# EAGLE board untitled (EAGLE 8.4.0)
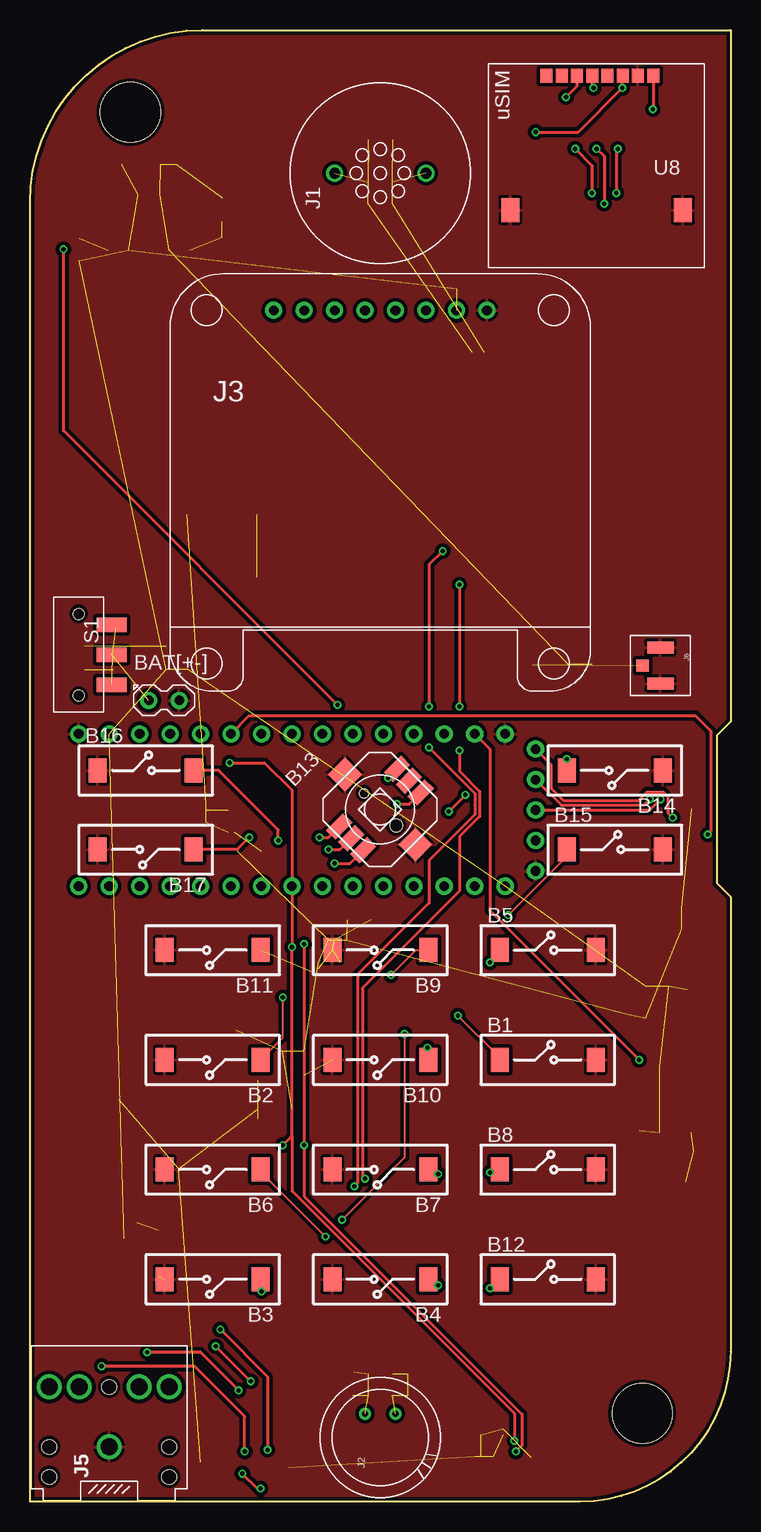
[diagram p0: board, top side]
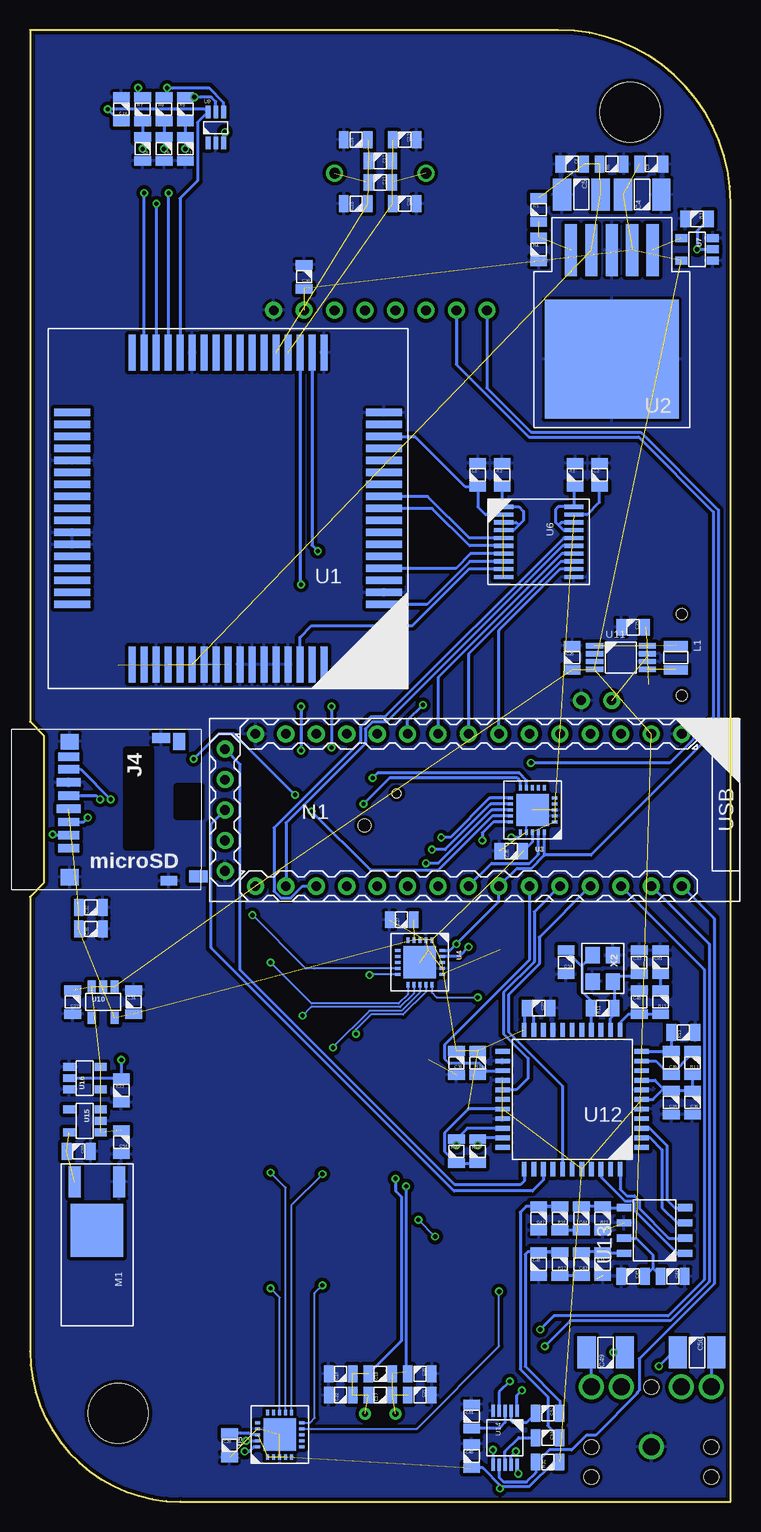
[diagram p1: board, bottom side, seen from below]

Size 58.42 x 122.68 mm. Coordinates in mm from the lower left corner, seen from the top.
Outline: 0,0 0,108.3 arc-90 14.38,122.68 58.42,122.68 58.42,65.02 57.28,63.88 57.28,51.56 58.42,50.42 58.42,12.53 arc-90 45.89,0 0,0
Copper layers (1*16): Top 0.035mm / dielectric 1.5mm / Bottom 0.035mm
Design rules "dooba": minimum track width 6mil, minimum drill 12mil, track to track 6mil, track to pad 6mil, pad to pad 6mil, via to via 6mil, smd to smd 0mil, copper to edge 10mil, drill to drill 10mil, minimum pad ring 10mil, minimum via ring 6mil, stop-mask expansion 2mil, vias tented up to drill 25mil, thermal gap 10mil
Holes 5 mm at 51.05,7.37 8.38,115.82

## Footprints (pad centres in the part's own frame; a part is rotated, then mirrored left to right if it is on the bottom)
TACTSW_MICRO3X6 = smd 1.5 x 2: 1 -4,0; 2 4,0
TACTSW-5WAY-7X7 = smd 2 x 1.1: 1 -3.4,1.4; 2 -3.4,0; 3 -3.4,-1.4; 4 3.4,1.4; 5 3.4,0; 6 3.4,-1.4 | smd 2 x 2: GND1 0,4.15; GND2 0,-4.15 | hole 0.75: 0,1.9 | hole 1.05: 0,-1.9
PIN_2 = drill 0.8 pad 1.422: 1 -1.27,0; 2 1.27,0
0805 = smd 0.8 x 1.4: 1 -1,0; 2 1,0
1210 = smd 1.524 x 2.678: 1 -1.6,0; 2 1.6,0
SPKR_AST_01532MR = drill 0.9: + 0,3.8; - 0,-3.8
MIC_CMA-4544PF-W = drill 0.5: + 2,1.27; - 2,-1.27
ADAFRUIT_OLED_13 = drill 0.8 pad 1.422: 3V3 3.81,0; CLK -6.35,0; CS 1.27,0; DATA -8.89,0; DC -3.81,0; GND 8.89,0; RST -1.27,0; VIN 6.35,0
DM3D-SF = smd 0.7 x 1.75: CLK/SCK -1.2,-1.34; CMD/DI 1,-1.34; DAT0/DO -3.4,-1.34; DAT1 -4.45,-1.34; DAT2 3.2,-1.34; DAT3/CS 2.1,-1.34 | smd 0.8 x 1.5: GND1 -6,6.36 | smd 0.8 x 1.4: GND2 5.9,7.01 | smd 1.4 x 1.5: GND3 5.6,-1.24 | smd 1.3 x 1.5: GND4 -5.7,-1.24 | smd 1 x 1.55: SW_A 5.55,9.46 | smd 1.4 x 1: SW_B -5.7,7.86 | smd 0.7 x 2.032: VDD -0.1,-1.34; VSS -2.3,-1.34
SJ1-352XN = drill 1.4 pad 2: 1 0,0; 2 5,-5; 3 5,5; 4 5,-2.5; 5 5,2.5 | hole 1.2: 5,0; 0,-5; 0,5; -2.5,5; -2.5,-5
CONUFL001 = smd 1 x 2.2: P$1 -1.5,0; P$2 1.5,0 | smd 1 x 1.05: P$3 0,-1.5
2520 = smd 0.8 x 2: 1 -1,0; 2 1,0
Z3OC_VIB_MOTOR = smd 2.6 x 1: 1 -0.5,1.85; 2 -0.5,-1.85 | smd 4.4 x 4.4: NC 3.55,0
DOOBA_IONODE = drill 0.8 pad 1.422: 1 16.51,6.35; 2 13.97,6.35; 3 11.43,6.35; 4 8.89,6.35; 5 6.35,6.35; 6 3.81,6.35; 7 1.27,6.35; 8 -1.27,6.35; 9 -3.81,6.35; 10 -6.35,6.35; 11 -8.89,6.35; 12 -11.43,6.35; 13 -13.97,6.35; 14 -16.51,6.35; 15 -19.05,6.35; 16 -19.05,-6.35; 17 -16.51,-6.35; 18 -13.97,-6.35; 19 -11.43,-6.35; 20 -8.89,-6.35; 21 -6.35,-6.35; 22 -3.81,-6.35; 23 -1.27,-6.35; 24 1.27,-6.35; 25 3.81,-6.35; 26 6.35,-6.35; 27 8.89,-6.35; 28 11.43,-6.35; 29 13.97,-6.35; 30 16.51,-6.35; 31 -21.59,5.08; 32 -21.59,2.54; 33 -21.59,0; 34 -21.59,-2.54; 35 -21.59,-5.08
JS102011 = smd 1.2 x 2.5: 1 -2.5,2.75; 2 0,2.75; 3 2.5,2.75 | hole 0.9: -3.4,0; 3.4,0
SIM5300 = smd 3 x 0.6: P$1 -13,8; P$2 -13,7; P$3 -13,6; P$4 -13,5; P$5 -13,4; P$6 -13,3; P$7 -13,2; P$8 -13,1; P$9 -13,0; P$10 -13,-1; P$11 -13,-2; P$12 -13,-3; P$13 -13,-4; P$14 -13,-5; P$15 -13,-6; P$16 -13,-7; P$17 -13,-8; P$35 13,-8; P$36 13,-7; P$37 13,-6; P$38 13,-5; P$39 13,-4; P$40 13,-3; P$41 13,-2; P$42 13,-1; P$43 13,0; P$44 13,1; P$45 13,2; P$46 13,3; P$47 13,4; P$48 13,5; P$49 13,6; P$50 13,7; P$51 13,8 | smd 0.6 x 3: P$18 -8,-13; P$19 -7,-13; P$20 -6,-13; P$21 -5,-13; P$22 -4,-13; P$23 -3,-13; P$24 -2,-13; P$25 -1,-13; P$26 0,-13; P$27 1,-13; P$28 2,-13; P$29 3,-13; P$30 4,-13; P$31 5,-13; P$32 6,-13; P$33 7,-13; P$34 8,-13; P$52 8,13; P$53 7,13; P$54 6,13; P$55 5,13; P$56 4,13; P$57 3,13; P$58 2,13; P$59 1,13; P$60 0,13; P$61 -1,13; P$62 -2,13; P$63 -3,13; P$64 -4,13; P$65 -5,13; P$66 -6,13; P$67 -7,13; P$68 -8,13
TO-263 = smd 1.02 x 4.32: P$1 -3.4,-6.8; P$2 -1.7,-6.8; P$3 0,-6.8; P$4 1.7,-6.8; P$5 3.4,-6.8 | smd 11.18 x 9.91: P$6 0,2.305
20-VQFN = smd 0.45 x 0.26: 1 -1.85,1; 2 -1.85,0.5; 3 -1.85,0; 4 -1.85,-0.5; 5 -1.85,-1; 11 1.85,-1; 12 1.85,-0.5; 13 1.85,0; 14 1.85,0.5; 15 1.85,1 | smd 0.26 x 0.45: 6 -1,-1.85; 7 -0.5,-1.85; 8 0,-1.85; 9 0.5,-1.85; 10 1,-1.85; 16 1,1.85; 17 0.5,1.85; 18 0,1.85; 19 -0.5,1.85; 20 -1,1.85 | smd 2.7 x 2.7: PAD 0,0
TSSOP-20 = smd 0.35 x 1.6: P$1 -2.925,-2.925; P$2 -2.275,-2.925; P$3 -1.625,-2.925; P$4 -0.975,-2.925; P$5 -0.325,-2.925; P$6 0.325,-2.925; P$7 0.975,-2.925; P$8 1.625,-2.925; P$9 2.275,-2.925; P$10 2.925,-2.925; P$11 2.925,2.925; P$12 2.275,2.925; P$13 1.625,2.925; P$14 0.975,2.925; P$15 0.325,2.925; P$16 -0.325,2.925; P$17 -0.975,2.925; P$18 -1.625,2.925; P$19 -2.275,2.925; P$20 -2.925,2.925
SOT23-5 = smd 0.66 x 1: 1 0.95,1.315; 2 0,1.315; 3 -0.95,1.315; 4 -0.95,-1.315; 5 0.95,-1.315
WE_USIM_HINGE = smd 1 x 1.2: C1 -4.72,0; C2 -2.18,0; C3 0.36,0; C4 2.9,0; C5 -3.45,0; C6 -0.91,0; C7 1.63,0; C8 4.17,0 | smd 1.5 x 2: GND@L -7.2,11.2; GND@R 7.2,11.2
SOT-323-6L = smd 0.4 x 1.05: P$1 -0.65,-1.3; P$2 0,-1.3; P$3 0.65,-1.3; P$4 0.65,1.3; P$5 0,1.3; P$6 -0.65,1.3
MSOP8 = smd 0.45 x 1.45: 1 -0.975,-2.2; 2 -0.325,-2.2; 3 0.325,-2.2; 4 0.975,-2.2; 5 0.975,2.2; 6 0.325,2.2; 7 -0.325,2.2; 8 -0.975,2.2
QFP44 = smd 1.2 x 0.4: 1 -5.8,4; 2 -5.8,3.2; 3 -5.8,2.4; 4 -5.8,1.6; 5 -5.8,0.8; 6 -5.8,0; 7 -5.8,-0.8; 8 -5.8,-1.6; 9 -5.8,-2.4; 10 -5.8,-3.2; 11 -5.8,-4; 23 5.8,-4; 24 5.8,-3.2; 25 5.8,-2.4; 26 5.8,-1.6; 27 5.8,-0.8; 28 5.8,0; 29 5.8,0.8; 30 5.8,1.6; 31 5.8,2.4; 32 5.8,3.2; 33 5.8,4 | smd 0.4 x 1.2: 12 -4,-5.8; 13 -3.2,-5.8; 14 -2.4,-5.8; 15 -1.6,-5.8; 16 -0.8,-5.8; 17 0,-5.8; 18 0.8,-5.8; 19 1.6,-5.8; 20 2.4,-5.8; 21 3.2,-5.8; 22 4,-5.8; 34 4,5.8; 35 3.2,5.8; 36 2.4,5.8; 37 1.6,5.8; 38 0.8,5.8; 39 0,5.8; 40 -0.8,5.8; 41 -1.6,5.8; 42 -2.4,5.8; 43 -3.2,5.8; 44 -4,5.8
SO8 = smd 0.6 x 1.2: P$1 -1.905,-2.54; P$2 -0.635,-2.54; P$3 0.635,-2.54; P$4 1.905,-2.54; P$5 1.905,2.54; P$6 0.635,2.54; P$7 -0.635,2.54; P$8 -1.905,2.54
PDSO-10 = smd 1 x 0.3: 1 -2.25,1; 2 -2.25,0.5; 3 -2.25,0; 4 -2.25,-0.5; 5 -2.25,-1; 6 2.25,-1; 7 2.25,-0.5; 8 2.25,0; 9 2.25,0.5; 10 2.25,1
XTAL_3225 = smd 1.4 x 1.2: 1 -1.1,-0.85; 2 1.1,-0.85; 3 1.1,0.85; 4 -1.1,0.85

## Placement (x,y rotation side)
B1  TACTSW_2MICRO3X6  [TACTSW_MICRO3X6]  43.18,36.83 0 top
B2  TACTSW_2MICRO3X6  [TACTSW_MICRO3X6]  15.24,36.83 180 top
B3  TACTSW_2MICRO3X6  [TACTSW_MICRO3X6]  15.24,18.54 180 top
B4  TACTSW_2MICRO3X6  [TACTSW_MICRO3X6]  29.21,18.54 180 top
B5  TACTSW_2MICRO3X6  [TACTSW_MICRO3X6]  43.18,45.97 0 top
B6  TACTSW_2MICRO3X6  [TACTSW_MICRO3X6]  15.24,27.69 180 top
B7  TACTSW_2MICRO3X6  [TACTSW_MICRO3X6]  29.21,27.69 180 top
B8  TACTSW_2MICRO3X6  [TACTSW_MICRO3X6]  43.18,27.69 0 top
B9  TACTSW_2MICRO3X6  [TACTSW_MICRO3X6]  29.21,45.97 180 top
B10  TACTSW_2MICRO3X6  [TACTSW_MICRO3X6]  29.21,36.83 180 top
B11  TACTSW_2MICRO3X6  [TACTSW_MICRO3X6]  15.24,45.97 180 top
B12  TACTSW_2MICRO3X6  [TACTSW_MICRO3X6]  43.18,18.54 0 top
B13  TACTSW_5WAYSMD-7X7  [TACTSW-5WAY-7X7]  29.19,57.7 45 top
B14  TACTSW_2MICRO3X6  [TACTSW_MICRO3X6]  48.77,60.96 180 top
B15  TACTSW_2MICRO3X6  [TACTSW_MICRO3X6]  48.77,54.36 0 top
B16  TACTSW_2MICRO3X6  [TACTSW_MICRO3X6]  9.65,60.96 0 top
B17  TACTSW_2MICRO3X6  [TACTSW_MICRO3X6]  9.65,54.36 180 top
BAT[+-]  PIN_2  [PIN_2]  11.18,66.8 0 top
C1  100nF  [0805]  21.08,85.6 270 bottom
C2  100nF  [0805]  10.92,85.6 270 bottom
C3  1uF  [0805]  6.6,111.51 0 bottom
C4  100uF  [1210]  7.37,108.97 0 bottom
C5  100uF  [1210]  12.45,108.97 180 bottom
C6  100nF  [0805]  13.21,111.51 180 bottom
C7  22pF  [0805]  45.47,112.78 90 bottom
C8  22pF  [0805]  47.24,112.78 90 bottom
C9  22pF  [0805]  49.02,112.78 90 bottom
C10  100nF  [0805]  50.8,116.08 90 bottom
C11  33pF  [0805]  29.21,109.98 180 bottom
C12  10pF  [0805]  29.21,111.76 180 bottom
C13  33pF  [0805]  27.18,113.54 180 bottom
C14  33pF  [0805]  31.24,113.54 0 bottom
C15  10pF  [0805]  31.24,108.2 0 bottom
C16  10pF  [0805]  27.18,108.2 180 bottom
C17  33pF  [0805]  29.21,8.89 0 bottom
C18  10pF  [0805]  29.21,10.67 0 bottom
C19  33pF  [0805]  32.51,10.67 0 bottom
C20  33pF  [0805]  25.91,10.67 180 bottom
C21  10pF  [0805]  25.91,8.89 180 bottom
C22  10pF  [0805]  32.51,8.89 0 bottom
C23  1uF  [0805]  54.86,41.66 90 bottom
C24  1uF  [0805]  49.78,41.66 270 bottom
C25  10uF  [0805]  8.13,72.9 180 bottom
C26  10uF  [0805]  13.21,70.36 270 bottom
C27  100nF  [0805]  27.43,48.51 0 bottom
C28  100nF  [0805]  18.29,54.23 0 bottom
C29  100nF  [0805]  41.78,4.7 270 bottom
C30  10uF  [0805]  35.56,102.11 90 bottom
C31  10uF  [0805]  53.34,47.75 0 bottom
C32  100nF  [0805]  53.34,49.53 0 bottom
C33  27pF  [0805]  7.62,44.96 270 bottom
C34  27pF  [0805]  13.72,44.96 90 bottom
C35  100nF  [0805]  4.95,33.27 90 bottom
C36  100nF  [0805]  3.17,33.27 90 bottom
C37  100nF  [0805]  16,41.15 180 bottom
C38  100nF  [0805]  22.86,36.58 90 bottom
C39  100nF  [0805]  4.95,36.58 90 bottom
C40  470pF  [0805]  7.62,41.66 270 bottom
C41  4.7nF  [0805]  5.84,44.96 270 bottom
C42  10uF  [0805]  4.83,18.8 180 bottom
C43  3.3uF  [0805]  12.45,19.81 90 bottom
C44  3.3uF  [0805]  12.45,23.62 90 bottom
C45  100nF  [0805]  8.13,18.8 180 bottom
C46  3.3nF  [0805]  16,19.81 270 bottom
C47  3.3nF  [0805]  16,23.62 90 bottom
C48  1uF  [0805]  21.59,3.81 270 bottom
C49  100uF  [1210]  10.41,12.45 0 bottom
C50  100uF  [1210]  2.79,12.45 180 bottom
C51  1uF  [0805]  21.59,7.11 270 bottom
C52  1uF  [0805]  15.24,7.37 180 bottom
C53  1uF  [0805]  15.24,5.33 180 bottom
C54  1uF  [0805]  50.8,29.97 90 bottom
C55  1uF  [0805]  54.36,29.21 180 bottom
J1  SPKRAST_01532MR  [SPKR_AST_01532MR]  29.21,110.74 90 top
J2  MICCMA-4544PF-W  [MIC_CMA-4544PF-W]  29.21,5.33 90 top
J3  ADAFRUIT_OLED_13  [ADAFRUIT_OLED_13]  29.21,99.31 0 top
J4  DM3D-SFDM  [DM3D-SF]  53.85,57.66 270 bottom
J5  SJ1-3523N  [SJ1-352XN]  6.6,4.57 90 top
J6  CONUFL001  [CONUFL001]  52.58,69.72 270 top
L1  4.7uH  [2520]  4.57,70.36 270 bottom
M1  Z3OC_VIB_MOTOR  [Z3OC_VIB_MOTOR]  52.83,26.16 270 bottom
N1  DOOBA_IONODE  [DOOBA_IONODE]  20.57,57.66 0 bottom
R1  10k  [0805]  12.95,85.6 270 bottom
R2  10k  [0805]  19.05,85.6 270 bottom
R3  10k  [0805]  2.79,106.93 180 bottom
R4  47k  [0805]  16,104.39 270 bottom
R5  100k  [0805]  16,107.7 270 bottom
R6  470R  [0805]  9.91,111.51 0 bottom
R7  51R  [0805]  49.02,116.08 270 bottom
R8  51R  [0805]  47.24,116.08 270 bottom
R9  51R  [0805]  45.47,116.08 270 bottom
R10  10k  [0805]  21.08,29.21 270 bottom
R11  1M  [0805]  10.67,41.15 0 bottom
R12  4.7R  [0805]  3.94,39.12 0 bottom
R13  4.7R  [0805]  3.17,36.58 90 bottom
R14  10k  [0805]  21.08,36.58 90 bottom
R15  1k  [0805]  5.84,41.66 90 bottom
R16  560R  [0805]  14.22,23.62 90 bottom
R17  560R  [0805]  14.22,19.81 90 bottom
R18  270k  [0805]  10.67,19.81 270 bottom
R19  270k  [0805]  10.67,23.62 90 bottom
R20  10k  [0805]  22.86,29.21 270 bottom
R22  100k  [0805]  15.24,3.3 0 bottom
R23  10k  [0805]  50.8,34.29 270 bottom
S1  SWITCH_SPDT  [JS102011]  4.06,70.61 270 top
U1  SIM5300EA  [SIM5300]  41.91,82.8 180 bottom
U2  MIC29302TO-263-5  [TO-263]  9.91,97.54 180 bottom
U3  MCP23008QFN  [20-VQFN]  16.51,57.66 180 bottom
U4  MCP23008QFN  [20-VQFN]  25.91,44.96 270 bottom
U5  MCP23008QFN  [20-VQFN]  37.59,5.59 90 bottom
U6  TXB0108  [TSSOP-20]  16,80.01 270 bottom
U7  SN74LVC1G125SOT23-5  [SOT23-5]  2.79,104.39 270 bottom
U8  USIM_CONN  [WE_USIM_HINGE]  47.24,118.87 180 top
U9  ESDA6V1-5W6  [SOT-323-6L]  42.93,114.55 0 bottom
U10  3.3V 600mA  [SOT23-5]  52.32,41.66 0 bottom
U11  MCP1642B  [MSOP8]  9.14,70.36 270 bottom
U12  STA013LQFP44  [QFP44]  13.21,33.53 180 bottom
U13  CS4334  [SO8]  6.35,22.61 90 bottom
U14  LM4811PDSO-10  [PDSO-10]  18.8,5.33 270 bottom
U15  2.7V 200mA  [SOT23-5]  53.85,31.75 270 bottom
U16  SN74LVC1G125SOT23-5  [SOT23-5]  53.85,35.31 90 bottom
X2  14.7456MHz  [XTAL_3225]  10.67,44.45 270 bottom

## Library data of the parts
B1-B17 BAT[+-] C1-C55 J1-J6 L1 M1 N1 R1-R20 R22 R23 S1 U1-U16 X2 = dooba

## Nets
2.7V: C55.2 M1.2 U15.5
3.3V: C2.2 C24.2 C27.2 C28.2 C29.1 C31.1 C32.1 C35.2 C36.2 C37.2 C38.2 C48.2 J4.VDD R10.2 R13.1 R14.2 R20.2 R22.2 U3.1 U3.4 U3.18 U4.1 U4.3 U4.4 U4.18 U5.1 U5.2 U5.4 U5.18 U6.P$19 U10.5 U12.6 U12.8 U12.21 U12.22 U12.29 U12.40 U14.10
3.8V: C5.1 C6.1 R5.1 R6.1 U1.P$55 U1.P$56 U1.P$57 U2.P$4
5.0V: C3.1 C4.1 C23.2 C26.2 C30.1 C42.2 C45.1 C54.2 J3.VIN N1.2 N1.16 U2.P$2 U7.5 U10.1 U10.3 U11.4 U13.P$7 U15.1 U16.5
!STA013_RST: N1.25 R14.1 U12.25
AMP_SHUTDOWN: N1.30 R22.1 U14.7
AMP_VOL_CLK: N1.29 U14.4
AMP_VOL_UPDN: N1.28 U14.6
AOUT_L: C46.1 C52.1 R17.2
AOUT_R: C47.2 C53.1 R16.2
GND: B1.2 B2.2 B3.2 B4.2 B5.2 B6.2 B7.2 B8.2 B9.2 B10.2 B11.2 B12.2 B13.5 B13.GND1 B13.GND2 B14.1 B15.2 B16.1 B17.2 BAT[+-].2 C1.1 C2.1 C3.2 C4.2 C5.2 C6.2 C7.1 C8.1 C9.1 C10.2 C13.1 C14.1 C15.1 C16.1 C19.1 C20.1 C21.1 C22.1 C23.1 C24.1 C25.2 C26.1 C27.1 C28.1 C29.2 C30.2 C31.2 C32.2 C33.1 C34.1 C35.1 C36.1 C37.1 C38.1 C40.1 C41.1 C42.1 C45.2 C46.2 C47.1 C48.1 C51.1 C54.1 C55.1 J3.GND J4.GND1 J4.GND2 J4.GND3 J4.GND4 J4.VSS J5.1 J6.P$1 J6.P$2 M1.1 N1.1 N1.15 N1.35 R1.1 R2.1 R3.2 R4.2 R6.2 R12.2 R18.2 R19.1 R23.2 U1.P$2 U1.P$17 U1.P$18 U1.P$29 U1.P$39 U1.P$45 U1.P$46 U1.P$54 U1.P$58 U1.P$59 U1.P$61 U1.P$62 U1.P$63 U1.P$64 U1.P$65 U2.P$3 U2.P$6 U3.2 U3.3 U3.17 U3.PAD U4.2 U4.17 U4.PAD U5.3 U5.17 U5.PAD U6.P$11 U7.1 U7.3 U8.C5 U8.GND@L U8.GND@R U9.P$2 U10.2 U11.6 U11.7 U12.5 U12.7 U12.19 U12.24 U12.26 U12.30 U13.P$6 U14.5 U15.2 U16.1 U16.3 X2.2 X2.4
GSM_PWR_EN: N1.10 R3.1 U7.2
GSM_PWR_KEY: N1.8 U6.P$13
GSM_RING: N1.9 U6.P$14
GSM_RXD: N1.18 U6.P$16
GSM_STATUS: N1.7 U6.P$12
GSM_TXD: N1.17 U6.P$15
I2C_SCL: J3.CLK N1.23 R10.1 U3.19 U4.19 U5.19 U12.32
I2C_SDA: J3.DATA N1.24 R20.1 U3.20 U4.20 U5.20 U12.31
MICROSD_CS: J4.DAT3/CS N1.6
N$1: B13.4 U3.9
N$2: B13.1 U3.11
N$3: B13.2 U3.12
N$4: B13.3 U3.13
N$5: B13.6 U3.10
N$6: B14.2 U3.14
N$7: B16.2 U3.15
N$8: B17.1 U3.16
N$9: B15.1 U4.9
N$10: B9.1 U4.10
N$11: B5.1 U4.11
N$12: B1.1 U4.12
N$13: B10.1 U4.13
N$14: B6.1 U4.14
N$15: B2.1 U4.15
N$16: B11.1 U4.16
N$17: B3.1 U5.9
N$18: B4.1 U5.10
N$19: B7.1 U5.11
N$20: B8.1 U5.12
N$21: B12.1 U5.13
N$22: C1.2 U1.P$15 U6.P$2 U6.P$10
N$23: U1.P$66 U6.P$9
N$24: U1.P$1 U6.P$8
N$25: U1.P$4 U6.P$7
N$26: U1.P$9 U6.P$6
N$27: U1.P$10 U6.P$5
N$28: U2.P$1 U7.4
N$29: R4.1 R5.2 U2.P$5
N$30: R1.2 U6.P$17 U6.P$18 U6.P$20
N$31: C10.1 U1.P$30 U8.C1 U9.P$6
N$32: R2.2 U6.P$1 U6.P$3 U6.P$4
N$33: R9.1 U8.C7 U9.P$5
N$34: R8.1 U8.C3 U9.P$4
N$35: C34.2 R11.1 U12.15 X2.1
N$36: R7.1 U8.C2 U9.P$3
N$37: C9.2 R7.2 U1.P$33
N$38: C8.2 R8.2 U1.P$32
N$39: C7.2 R9.2 U1.P$31
N$40: C33.2 R11.2 U12.13 X2.3
N$41: L1.2 U11.5
N$42: C39.1 R13.2 U12.10
N$43: C11.2 C12.2 C14.2 C15.2 J1.- U1.P$22
N$44: C11.1 C12.1 C13.2 C16.2 J1.+ U1.P$21
N$45: C39.2 R12.1 U12.11
N$46: C41.2 R15.2
N$47: C17.2 C18.2 C20.2 C21.2 J2.+ U1.P$19
N$48: C17.1 C18.1 C19.2 C22.2 J2.- U1.P$20
N$49: C40.2 R15.1 U12.12
N$50: C43.2 R18.1 U13.P$8
N$51: C44.2 R19.2 U13.P$5
N$52: C44.1 R16.1
N$53: C43.1 R17.1
N$54: C49.2 U14.1
N$55: C50.2 U14.9
N$56: C51.2 U14.3
N$57: C50.1 J5.3
N$58: C52.2 U14.2
N$59: C53.2 U14.8
N$60: C49.1 J5.2
N$61: J6.P$3 U1.P$60
N$62: U15.3 U16.4
SPI_MISO: J4.DAT0/DO N1.32
SPI_MOSI: J4.CMD/DI N1.31 U12.34
SPI_SCK: J4.CLK/SCK N1.33 U12.36
STA013_BIT_EN: N1.27 U12.38
STA013_DREQ: N1.26 U12.27
STA013_LRCKT: U12.2 U13.P$3
STA013_OCLK: U12.3 U13.P$4
STA013_SCKT: U12.44 U13.P$2
STA013_SDO: U12.42 U13.P$1
VBAT: BAT[+-].1 S1.2
VIBRATOR_EN: N1.14 R23.1 U16.2
VIN: C25.1 L1.1 S1.3 U11.1 U11.8

## Tracks (layer width: path | path; a pad name or v marks a point on that pad's centre or on a via)
2.7V  (2 unrouted)
3.3V  (via drill 0.36)  (24 unrouted)
  Top 0.254: v17.71,2.34 18.9,1.14 19.05,1.14 19.09,1.1 v19.23,1.1
  Bottom 0.254: C48.2 20.66,2.81 19.09,1.25 | 19.09,1.25 16.8,1.25 14.74,3.3 R22.2 | U14.10 17.8,2.43 v17.71,2.34 | v19.23,1.1 19.09,1.25 | U12.21 16.41,40.41 17.07,41.08 C37.2 17.21,40.94 U12.22 | R13.1 C36.2 C35.2 4.97,34.29 5.59,34.42 | U12.8 6.3,35.13 5.59,34.42 | U12.6 6.48,33.53 5.59,34.42 | R10.2 R20.2 23.84,29.19 23.84,30.73 21.84,32.73 U12.29 | U6.P$19 11.95,82.28 10.92,83.31 C2.2 | U5.18 40.03,5.59 40.13,5.69 C29.1 | U3.18 16.51,55.01 C28.2
3.8V  (7 unrouted)
5.0V  (16 unrouted)
  Bottom 0.254: U13.P$7 7.87,21.97 6.48,20.57 6.48,19.45 | 6.48,19.45 C42.2 | 6.48,19.45 C45.1
!STA013_RST
  Bottom 0.254: R14.1 20.84,35.81 20.45,35.81 20.33,35.93 | 20.33,35.93 U12.25 | N1.25 16.76,45.17 23.84,38.09 23.84,36.92 23.5,36.58 20.98,36.58 20.33,35.93
AMP_SHUTDOWN
  Bottom 0.254: U14.7 19.3,2.02 18.92,1.65 17.02,1.65 16.24,2.43 R22.1 16.13,3.3 15.11,4.32 13.24,4.32 12.01,5.55 11.24,5.55 7.78,9.02 7.78,9.12 7.62,9.27 7.62,11.93 1.37,18.18 1.37,48.62 N1.30
AMP_VOL_CLK  (via drill 0.36)
  Top 0.254: v15.49,12.95 v18.41,10.03
  Bottom 0.254: N1.29 1.78,46.48 1.78,18.35 5.04,15.09 13.36,15.09 v15.49,12.95 | v18.41,10.03 19.3,9.15 U14.4
AMP_VOL_UPDN  (via drill 0.36)
  Top 0.254: v15.88,14.35 19.81,10.41 v19.81,4.32
  Bottom 0.254: N1.28 2.2,44.36 2.2,18.5 5.21,15.49 14.73,15.49 v15.88,14.35 | v19.81,4.32 19.81,3.1 U14.6
AOUT_L
  Bottom 0.254: C46.1 R17.2 16.91,20.81 17.12,20.6 17.12,11.28 14.22,8.38 14.22,7.38 C52.1
AOUT_R
  Bottom 0.254: C47.2 R16.2 17.03,24.62 17.53,24.13 17.53,11.05 15.24,8.76 15.24,6.33 C53.1
GND  (13 unrouted)
  Bottom 0.152: U3.17 17.01,56.63 17.02,56.64 17.02,57.15 U3.PAD
  pour Top (isolate 0.305): 0,122.68 58.42,122.68 58.42,0 0,0
  pour Bottom (isolate 0.305): 0,122.68 58.42,122.68 58.42,0 0,0
GSM_PWR_EN  (via drill 0.36)
  Top 0.254: v25.65,66.42 2.79,89.28 v2.79,104.39
  Bottom 0.254: N1.10 26.92,65.15 v25.65,66.42 | U7.2 v2.79,104.39 2.79,105.93 R3.1
GSM_PWR_KEY
  Bottom 0.254: U6.P$13 14.14,78.39 21.84,70.68 N1.8
GSM_RING
  Bottom 0.254: U6.P$14 14.06,79.03 24.38,68.71 N1.9
GSM_RXD
  Bottom 0.254: U6.P$16 13.91,80.33 28.84,65.41 30.04,65.41 30.86,64.59 30.86,63.39 38.08,56.17 38.08,50.9 37.49,50.32 36.67,50.32 35.68,51.31 N1.18
GSM_STATUS
  Bottom 0.254: U6.P$12 14.21,77.73 19.3,72.64 N1.7
GSM_TXD
  Bottom 0.254: U6.P$15 13.99,79.69 28.67,65 29.87,65 30.45,64.42 30.45,63.22 37.08,56.59 N1.17
I2C_SCL  (via drill 0.36)
  Top 0.254: v21.08,29.72 21.84,30.48 | 21.84,30.48 v21.84,46.23 N1.23 21.84,59.31 19.56,61.59 v16.64,61.59 | 21.84,30.48 21.84,25.91 40.39,7.37 v40.39,5.08
  Bottom 0.254: U12.32 20.96,30.33 R10.1 v21.08,29.72 | v21.84,46.23 22.61,45.46 U4.19 | N1.23 19.94,53.21 16.76,53.21 16.01,53.97 U3.19 | v40.39,5.08 40.38,5.09 U5.19 | J3.CLK 22.86,94.8 16.8,88.75 7.66,88.75 1.42,82.51 1.42,65.41 3.07,63.75 3.07,63.6 5.08,61.59 v16.64,61.59
I2C_SDA  (via drill 0.36)
  Top 0.254: v22.86,46.48 v22.86,29.72 22.86,25.47 41.02,7.31 41.02,4.7 v40.51,4.19
  Bottom 0.254: U12.31 21.94,31.13 R20.1 v22.86,29.72 | U4.20 23.38,45.96 v22.86,46.48 19.3,50.04 N1.24 17.8,52.81 16.6,52.81 15.51,53.89 | 15.51,53.89 U3.20 | U5.20 39.73,4.59 40.13,4.19 v40.51,4.19 | J3.DATA 20.32,92.84 16.64,89.15 7.49,89.15 1.02,82.68 1.02,64.52 11.64,53.89 15.51,53.89
MICROSD_CS  (via drill 0.36)
  Top 0.254: N1.6 18.29,65.53 55.5,65.53 56.77,64.26 56.77,55.88 v56.52,55.63
  Bottom 0.254: v56.52,55.63 56.45,55.56 J4.DAT3/CS
N$1  (via drill 0.36)
  Top 0.254: v29.84,60.33 v29.84,60.34 B13.4
  Bottom 0.254: U3.9 17.01,60.13 17.61,60.73 29.44,60.73 v29.84,60.33
N$2  (via drill 0.36)
  Top 0.254: v24.13,55.37 24.88,55.37 B13.1
  Bottom 0.254: U3.11 20.09,58.66 23.37,55.37 v24.13,55.37
N$3  (via drill 0.36)
  Top 0.254: v24.89,54.36 25.85,54.36 B13.2
  Bottom 0.254: U3.12 20.01,58.16 23.82,54.36 v24.89,54.36
N$4  (via drill 0.36)
  Top 0.254: v25.4,53.21 26.68,53.21 B13.3
  Bottom 0.254: U3.13 19.94,57.66 24.38,53.21 v25.4,53.21
N$5  (via drill 0.36)
  Top 0.254: B13.6 31.64,58.17 v30.61,58.17
  Bottom 0.254: U3.10 17.51,60.05 17.78,60.33 28.45,60.33 v30.61,58.17
N$6  (via drill 0.36)
  Top 0.254: v44.77,61.91 B14.2 | v34.92,57.53 v36.32,58.93
  Bottom 0.254: U3.14 19.86,57.16 24.42,52.6 30,52.6 v34.92,57.53 | v36.32,58.93 41.4,64.01 42.67,64.01 v44.77,61.91
N$7  (via drill 0.36)
  Top 0.254: v20.7,55.12 20.7,56.01 15.75,60.96 B16.2
  Bottom 0.254: U3.15 19.79,56.66 20.7,55.75 v20.7,55.12
N$8  (via drill 0.36)
  Top 0.254: v18.29,55.37 17.27,54.36 B17.1
  Bottom 0.254: U3.16 17.51,55.52 17.65,55.37 v18.29,55.37
N$9  (via drill 0.36)
  Top 0.152: B15.1 44.77,53.78 v39.88,48.9
  Bottom 0.152: U4.9 34.66,44.46 34.67,44.45 35.43,44.45 v39.88,48.9
N$10  (via drill 0.36)
  Top 0.152: v30.1,43.9 32.17,45.97 B9.1
  Bottom 0.152: U4.10 30.08,43.96 30.1,43.94 v30.1,43.9
N$11  (via drill 0.36)
  Top 0.152: v38.35,44.96 38.35,45.15 B5.1
  Bottom 0.152: U4.11 26.91,42.31 27.69,41.53 34.92,41.53 v38.35,44.96
N$12  (via drill 0.36)
  Top 0.152: v35.69,40.51 39.18,37.02 B1.1
  Bottom 0.152: U4.12 26.41,42.38 27.56,41.22 34.98,41.22 v35.69,40.51
N$13  (via drill 0.36)
  Top 0.152: v33.15,37.85 33.21,37.78 B10.1
  Bottom 0.152: U4.13 25.91,42.45 27.43,40.92 30.12,40.92 33.15,37.9 v33.15,37.85
N$14  (via drill 0.36)
  Top 0.152: v31.24,38.99 31.24,28.7 v26.04,23.5 | v24.64,22.1 19.24,27.5 B6.1
  Bottom 0.152: U4.14 25.41,42.51 27.31,40.62 30,40.62 31.24,39.37 v31.24,38.99 | v26.04,23.5 v24.64,22.1
N$15  (via drill 0.36)
  Top 0.152: v21.08,42.04 21.08,38.67 B2.1
  Bottom 0.152: U4.15 24.91,42.43 24.51,42.04 v21.08,42.04
N$16  (1 unrouted)
N$17  (via drill 0.36)
  Top 0.152: v19.3,17.53 19.24,17.59 B3.1
  Bottom 0.152: U5.9 26.17,6.09 19.3,12.95 v19.3,17.53
N$18  (via drill 0.36)
  Top 0.152: v34.04,18.03 33.53,18.54 B4.1
  Bottom 0.152: U5.10 35.07,6.59 34.67,6.99 34.67,17.4 v34.04,18.03
N$19  (via drill 0.36)
  Top 0.152: v34.04,27.3 33.66,27.69 B7.1
  Bottom 0.152: U5.11 36.59,24.75 v34.04,27.3
N$20  (via drill 0.36)
  Top 0.152: v38.35,27.43 38.93,27.43 B8.1
  Bottom 0.152: U5.12 37.09,26.17 v38.35,27.43
N$21  (via drill 0.36)
  Top 0.152: v38.35,17.78 38.42,17.78 B12.1
  Bottom 0.152: U5.13 37.59,17.02 v38.35,17.78
N$22  (1 unrouted)
  Bottom 0.254: U6.P$2 20.44,82.28 21.08,82.93 21.08,84.58 C1.2 22.08,84.6 22.1,84.58 26.32,88.8 U1.P$15
N$23
  Bottom 0.254: U6.P$9 21.83,77.73 26.54,73.03 34.92,73.03 35.91,72.04 U1.P$66
N$24
  Bottom 0.254: U1.P$1 25.33,74.8 21.75,78.39 U6.P$8
N$25
  Bottom 0.254: U1.P$4 22.91,77.8 21.68,79.03 U6.P$7
N$26
  Bottom 0.254: U1.P$9 24.89,82.8 21.77,79.69 U6.P$6
N$27
  Bottom 0.254: U1.P$10 25.26,83.8 21.79,80.33 U6.P$5
N$28  (1 unrouted)
N$29  (2 unrouted)
N$30
  Bottom 0.254: R1.2 13.08,84.47 U6.P$20 14.35,82.94 14.61,82.68 14.61,81.66 14.35,81.41 | U6.P$18 14.12,81.64 14.35,81.41 | U6.P$17 13.93,80.98 14.35,81.41
N$31  (via drill 0.36)
  Top 0.254: U8.C1 51.96,116.1 v51.94,116.08
  Bottom 0.254: U1.P$30 45.91,108.65 44.45,110.11 44.45,114.98 U9.P$6 43.8,116.08 v51.94,116.08 50.94,115.08 C10.1
N$32
  Bottom 0.254: R2.2 19.05,83.06 U6.P$1 17.66,82.94 17.27,82.55 17.27,81.79 17.65,81.41 | U6.P$3 17.88,81.64 17.65,81.41 | U6.P$4 18.07,80.98 17.65,81.41
N$33  (via drill 0.36)
  Top 0.254: U8.C7 45.61,118 v44.7,117.09
  Bottom 0.254: U9.P$5 42.93,116.71 43.31,117.09 v44.7,117.09 45.45,117.09 R9.1
N$34  (via drill 0.36)
  Top 0.254: v46.99,117.86 46.88,117.96 U8.C3
  Bottom 0.254: U9.P$4 42.28,116.64 43.49,117.86 v46.99,117.86 46.99,117.33 R8.1
N$35
  Bottom 0.254: U12.15 11.61,41.09 R11.1 11.67,41.8 12.4,42.53 12.4,44.67 | 12.4,44.67 X2.1 | C34.2 12.43,44.67 12.4,44.67
N$36  (via drill 0.36)
  Top 0.254: U8.C2 49.4,118.85 v49.4,117.86 45.72,114.17 v42.16,114.17
  Bottom 0.254: R7.1 49.4,117.46 v49.4,117.86 | U9.P$3 42.28,114.06 v42.16,114.17
N$37  (via drill 0.36)
  Top 0.254: v49.02,112.78 48.9,112.65 v48.9,109.09
  Bottom 0.254: R7.2 C9.2 v49.02,112.78 | U1.P$33 48.9,95.82 v48.9,109.09
N$38  (via drill 0.36)
  Top 0.254: v47.24,112.78 47.88,112.14 v47.88,108.2
  Bottom 0.254: R8.2 C8.2 v47.24,112.78 | v47.88,108.2 47.91,108.17 U1.P$32
N$39  (via drill 0.36)
  Top 0.254: v45.47,112.78 46.86,111.38 v46.86,109.09
  Bottom 0.254: R9.2 C7.2 v45.47,112.78 | v46.86,109.09 46.91,109.05 U1.P$31
N$40
  Bottom 0.254: C33.2 7.99,43.96 8.13,43.81 9.35,43.81 X2.3 9.67,43.2 R11.2 9.65,41.13 9.65,40.64 10.01,40.28 U12.13
N$41  (1 unrouted)
N$42
  Bottom 0.254: U12.10 6.25,36.73 5.21,35.69 4.97,35.56 C39.1 3.17,37.35 R13.2
N$43  (5 unrouted)
N$44  (5 unrouted)
N$45
  Bottom 0.254: R12.1 4.94,37.59 C39.2 5.13,37.4 5.25,37.53 U12.11
N$46
  Bottom 0.254: C41.2 R15.2
N$47  (via drill 0.36)  (4 unrouted)
  Top 0.254: v34.42,79.25 33.27,78.11 v33.27,66.29 | v33.27,62.87 37.08,59.05 37.08,58.04 37.08,57.28 33.27,53.47 33.27,49.91 27.3,43.94 27.3,26.54 v27.05,26.29
  Bottom 0.254: U1.P$19 34.91,79.74 v34.42,79.25 | v33.27,66.29 v33.27,62.87 | v27.05,26.29 27.05,10.81 C20.2
N$48  (via drill 0.36)  (4 unrouted)
  Top 0.254: v35.81,76.45 v35.81,66.29 | v35.81,62.61 35.81,60.9 37.49,59.22 37.49,57.11 35.81,55.43 35.81,50.93 27.71,42.82 27.71,27.15 v27.94,26.92
  Bottom 0.254: U1.P$20 35.91,76.55 v35.81,76.45 | v35.81,66.29 v35.81,62.61 | v27.94,26.92 27.94,25.91 27.46,25.43 27.46,13.42 C18.1
N$49
  Bottom 0.254: R15.1 C40.2 8.49,40.66 9.21,39.94 U12.12
N$50
  Bottom 0.254: U13.P$8 10.67,20.7 R18.1 C43.2
N$51
  Bottom 0.254: U13.P$5 10.67,24.51 R19.2 C44.2
N$52
  Bottom 0.254: C44.1 R16.1
N$53
  Bottom 0.254: C43.1 R17.1
N$54  (via drill 0.36)
  Top 0.254: v17.4,9.27 14.22,12.45 v9.78,12.45
  Bottom 0.254: U14.1 17.8,8.87 v17.4,9.27 | v9.78,12.45 C49.2
N$55  (via drill 0.36)
  Top 0.254: v17.91,4.19 17.91,7.11 13.72,11.3 v5.97,11.3
  Bottom 0.254: U14.9 18.3,3.8 v17.91,4.19 | v5.97,11.3 4.83,12.45 C50.2
N$56
  Bottom 0.254: U14.3 18.8,6.6 19.29,6.11 C51.2
N$57
  Bottom 0.254: C50.1 1.6,12.04 J5.3
N$58
  Bottom 0.254: U14.2 18.3,6.74 18.16,6.6 17,6.6 C52.2
N$59
  Bottom 0.254: U14.8 18.8,4.19 17.65,5.33 C53.2
N$60
  Bottom 0.254: J5.2 11.6,12.04 C49.1
N$61  (1 unrouted)
N$62  (1 unrouted)
SPI_MISO  (via drill 0.36)
  Top 0.254: N1.32 44.3,58.06 51.21,58.06 v51.69,58.55
  Bottom 0.254: J4.DAT0/DO 54.2,61.06 v51.69,58.55
SPI_MOSI  (via drill 0.36)
  Top 0.254: N1.31 43.43,61.47 43.43,59.5 44.47,58.47 50.75,58.47 51.44,59.16 52.83,59.16 53.19,58.8 53.19,57.43 v53.59,57.02
  Bottom 0.254: J4.CMD/DI 53.96,56.66 v53.59,57.02 | U12.34 17.21,26.73 17.53,26.42 22.99,26.42 40.89,44.32 40.89,61.47 N1.31
SPI_SCK  (via drill 0.36)
  Top 0.254: N1.33 51.69,57.66 v52.58,58.55
  Bottom 0.254: J4.CLK/SCK 52.89,58.86 v52.58,58.55 | U12.36 15.61,26.81 16.51,25.91 23.05,25.91 43.31,46.16 43.31,56.52 N1.33
STA013_BIT_EN
  Bottom 0.254: N1.27 15.95,47.04 15.95,44.83 18.52,42.27 18.52,39.16 14.01,34.65 U12.38
STA013_DREQ
  Bottom 0.254: N1.26 16.36,49.17 16.36,45 18.92,42.43 18.92,38.99 16.89,36.96 16.89,35.31 17.87,34.33 U12.27
STA013_LRCKT
  Bottom 0.254: U12.2 6.71,30.33 5.71,29.34 5.71,24.51 4.45,23.24 U13.P$3
STA013_OCLK
  Bottom 0.254: U12.3 6.74,31.13 5.31,29.69 5.31,25.17 4.65,24.51 U13.P$4
STA013_SCKT
  Bottom 0.254: U12.44 9.21,26.04 8.67,25.5 8.01,25.5 7.6,25.09 7.6,24.43 5.14,21.97 U13.P$2
STA013_SDO
  Bottom 0.254: U12.42 10.81,27.06 8.83,25.09 8.17,25.09 8.01,24.93 8.01,24.27 4.45,20.7 U13.P$1
VBAT  (1 unrouted)
VIBRATOR_EN  (via drill 0.36)
  Top 0.254: N1.14 38.35,62.74 38.35,49.28 v50.8,36.83
  Bottom 0.254: v50.8,36.83 R23.1 55.15,35.29 U16.2
VIN  (4 unrouted)